# Altium PCB 06002479宁波2号线二期车载PIS系统_功率放大器功放板2  BHC-A-2030-04_PCB V1.0.PcbDoc (part 1 of 2)
Units mil, origin at the board's own origin, x right, y up, seen from the top; angles counter-clockwise.
Board outline 6377.95 x 3937.01 mil, 2 copper layers (Top Layer, Bottom Layer); 141 components, 101 nets, 406 pads, 71 vias.
Unrouted connection lines stored in the file: 3.
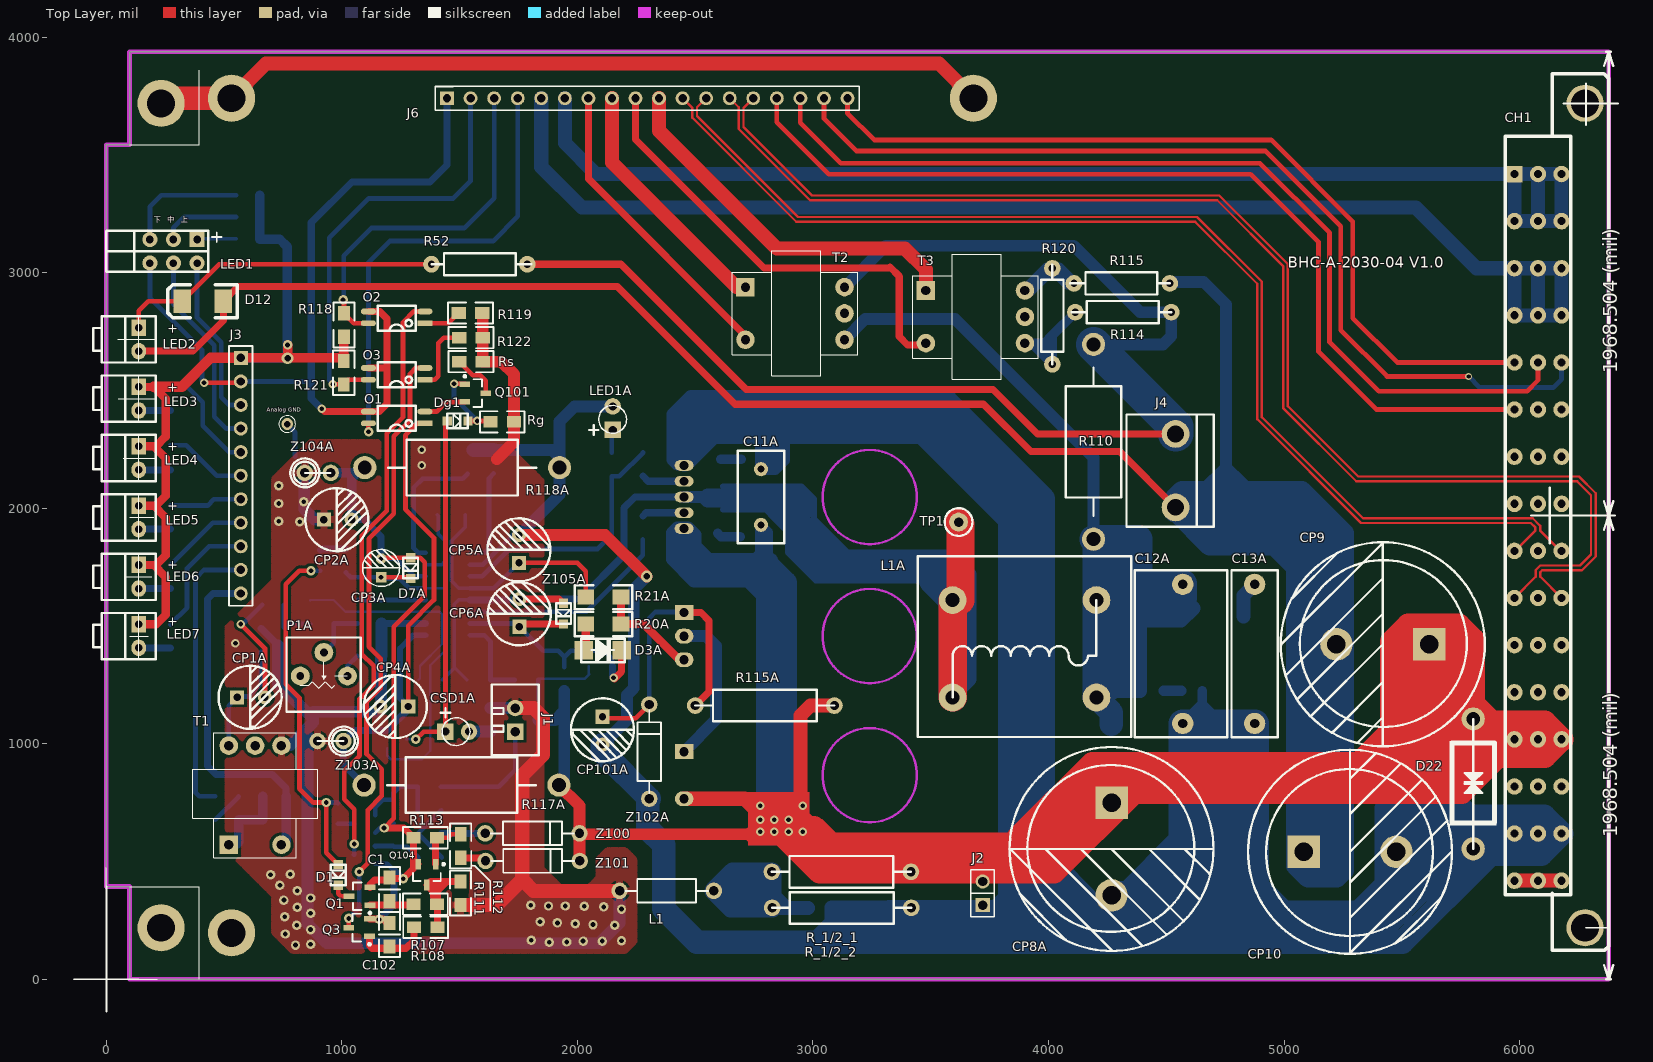
[diagram p0: Top Layer view]
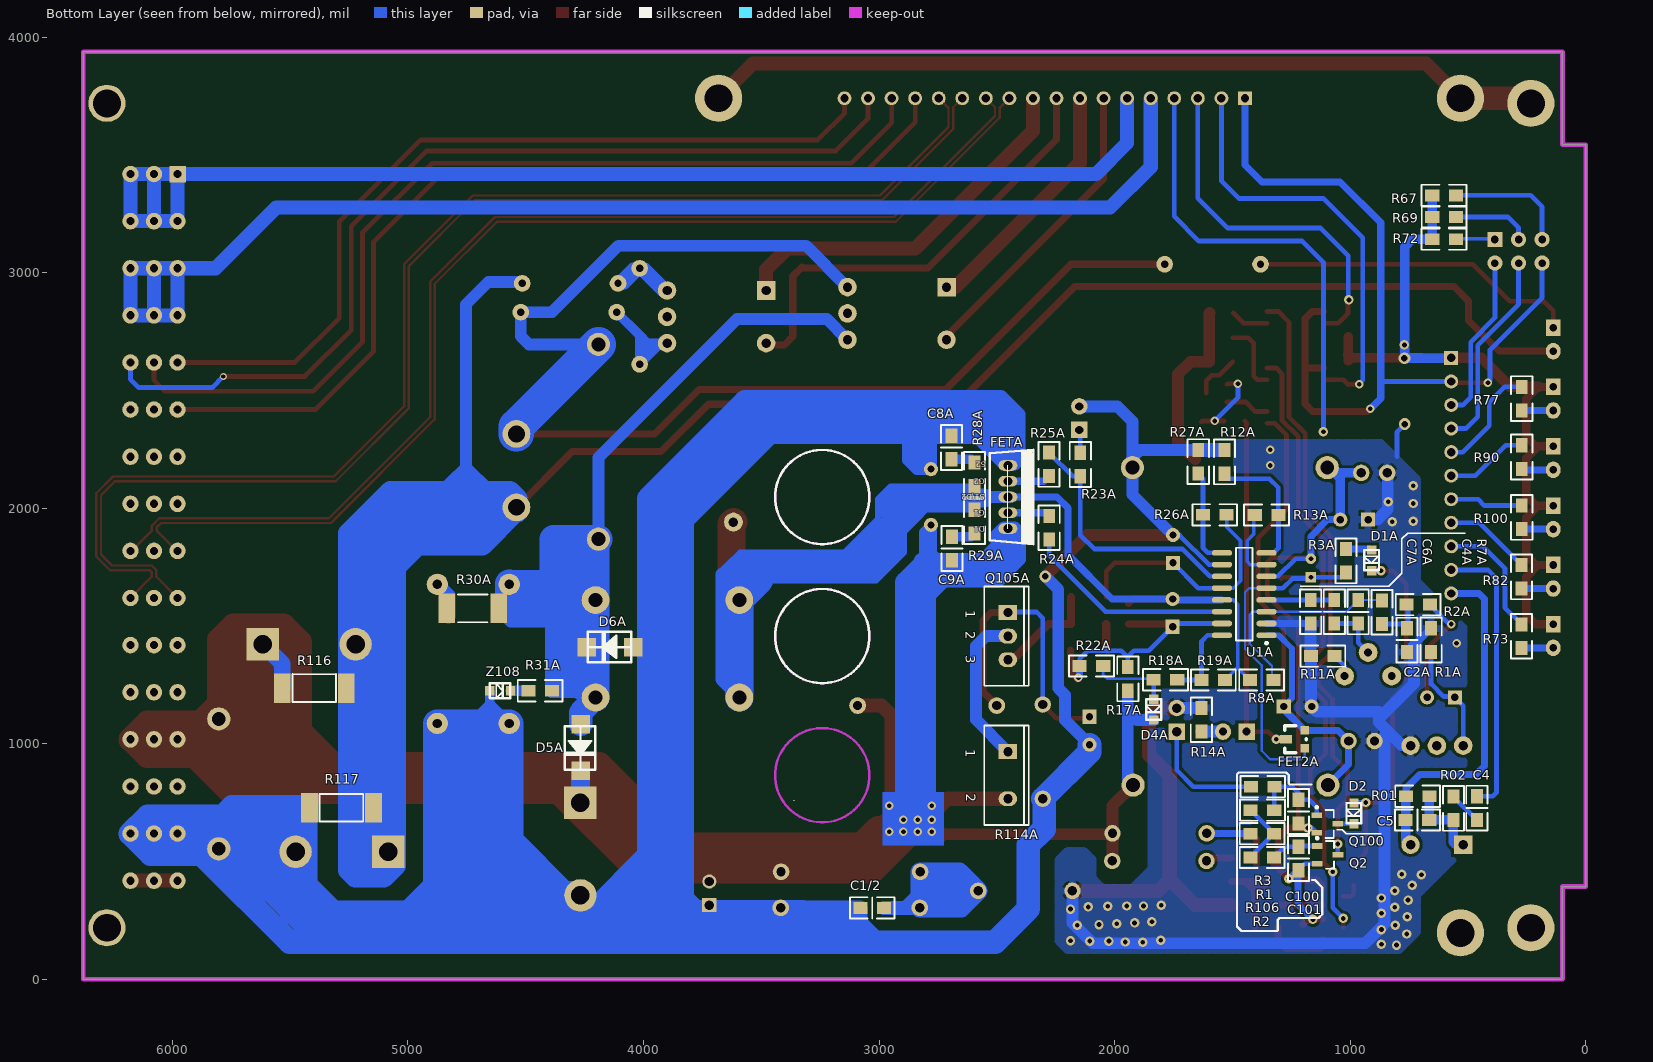
[diagram p1: Bottom Layer view, seen from below]

## Layer stack, top to bottom
Top Layer: signal copper 1.4
Dielectric: dielectric 12.6, FR-4, Dk 4.8
Bottom Layer: signal copper 1.4

## Board outline
0,393.7 0,3543.31 98.43,3543.31 98.43,3937.01 98.42,3937.01 6377.95,3937.01 6377.95,0 98.43,0 98.43,393.7

## Design rules (kind name [scope] priority, off if disabled: settings)
Clearance Clearance_1 [InPolygon] p1: gap=12
Clearance [All] p2: gap=10
ComponentClearance [All] p1: gap=0 collisioncheckmode=3 verticalgap=0 showdistances=FALSE
Height [All] p1: minheight=0 maxheight=1220.47 prefheight=500
HoleSize [All] p1: absolutevalues=TRUE maxlimit=500 minlimit=1 maxpercent=80.000 minpercent=20.000
MinimumSolderMaskSliver [All] p1: minsoldermaskwidth=0
PlaneConnect [All] p1: planeconnectstyle=Relief reliefexpansion=20 reliefentries=4 reliefconductorwidth=40 reliefairgap=20
PolygonConnect PolygonConnect_1 [Isvia] p1: connectstyle=Direct reliefconductorwidth=10 reliefentries=4 polygonreliefangle="90 Angle" airgapwidth=10
PolygonConnect [All] p2: connectstyle=Relief reliefconductorwidth=30 reliefentries=4 polygonreliefangle="90 Angle" airgapwidth=10
RoutingVias [All] p1: holewidth=28 width=50 viastyle="Through Hole" minholewidth=15 minwidth=30 maxholewidth=28 maxwidth=50
SilkToSilkClearance [All] p1: silktosilkclearance=0
SilkToSolderMaskClearance [IsPad] p1: minsilkscreentomaskgap=0 clearancetoexposedcopper=TRUE
SolderMaskExpansion [All] p1: expansion=4
Width [All] p1: maxlimit=200 minlimit=8 preferedwidth=10 minimp=50.000000 maximp=50.000000 favimp=50.000000
21 further rules are at their usual default settings.

## Components (designator, comment, footprint, x,y, rotation, side; value= is the part's Value field where it differs from the comment)
C1 "" c0805 1202,381 r270 top
C1/2 "Cap" C0805 3028.43,303.01 r180 bottom
C2A "" c0805 758.43,1440.26 r90 bottom
C4 "Cap" c0805 461.85,726.27 r270 bottom
C4A "" c0805 965.71,1559.47 r270 bottom
C5 "Cap" c0805 713.85,676.27 r180 bottom
C6A "" c0805 1067.09,1560.46 r90 bottom
C7A "" c0805 1167.48,1560.46 r90 bottom
C8A "" c0805 2692.31,2257.13 r270 bottom
C9A "" c0805 2690.31,1828.13 r270 bottom
C11A "" MKP-0.1-160V 2779.53,2047.24 r270 top
C12A "" MKP-7.5-10-15-400V 4570,1086 r90 top
C13A "" MKP-15-100V 4875,1086 r90 top
C100 "" c0805 1218.85,712.27 r90 bottom
C101 "" c0805 1219,513 r90 bottom
C102 "" c0805 1202,189 r270 top
CH1 "OPIN-48" OPIN-48F 6377.95,1968.5 r0 top locked
CP1A "" RB1/2 555.12,1196.85 r0 top
CP2A "" RB1/2 923.43,1951.26 r0 top
CP3A "" E10 1166.43,1746.26 r90 top
CP4A "" RB1/2 1281.65,1157.9 r180 top
CP5A "" RB1/2 1751.97,1767.72 r90 top
CP6A "" RB1/2 1753.43,1496.26 r90 top
CP8A "" CD-22*30 4267.43,553.01 r270 top
CP9 "" CD-22*30 5419,1422 r180 top
CP10 "" CD-22*30 5280,541 r0 top
CP101A "" RB1/2 2106.3,1114.17 r270 top
CSD1A "RED" LED-3 1489.85,1051.27 r0 top
D1 "" SOD-323 984.85,486.27 r270 top
D1A "" SOD-323 908.62,1822.27 r270 bottom
D2 "" SOD-323 983.85,748.27 r270 bottom
D3A "DIODE" MURA120T3G#1 2027.56,1397.64 r0 top
D4A "DIODE" SOD-323 1833.82,1188.41 r270 bottom
D5A "DIODE" MURA120T3G#2 4267,1082 r270 bottom
D6A "DIODE" MURA120T3G#2 4044,1409 r0 bottom
D7A "DIODE" SOD-323 1291.85,1789.27 r270 top
D12 "DIODE" 7227AK 409.45,2877.95 r180 top
D22 "D_TVS" TVS-CA 5803,1105 r270 top
Dg1 "" SOD-323 1447.64,2370.08 r0 top
FET2A "BS250F" STO23 1195.85,977.27 r90 bottom
FETA "IRFI4020" MOS_diy 2452.76,2047.24 r270 bottom locked
J1 "Jump" CH2.54-2 1735.85,1051.27 r90 top
J2 "CON2" SIP2.54-2 3720.47,314.96 r90 top
J3 "CON11" SIP2.54-11 570.87,2637.8 r90 top
J4 "CON2" CH3.96-3P+ 4539.37,2314.96 r270 top
J6 "CON18" SIP2.54-18 1446.46,3740.16 r0 top locked
L1 "磁珠" L-AXIAL0.4 2178.85,375.27 r0 top
L1A "Inductor Iron" 7G23A 3593,1196 r90 top
LED1 "LED" LED-3-3-L 118.11,3090.55 r0 top
LED1A "Blue" LED-3 2149.61,2381.89 r90 top
LED2 "RED" LED-3-L 137.8,2716.54 r90 top
LED3 "" LED-3-L 137.8,2464.57 r90 top
LED4 "" LED-3-L 137.8,2212.6 r90 top
LED5 "" LED-3-L 137.8,1960.63 r90 top
LED6 "" LED-3-L 137.8,1708.66 r90 top
LED7 "" LED-3-L 137.8,1456.69 r90 top
O1 "TLP281" SOP4 1352.43,2360.01 r180 top
O2 "TLP281" SOP4 1352.43,2785.01 r180 top
O3 "TLP281" SOP4 1352.43,2545.01 r180 top
P1A "Pot" 3362/3323 822.39,1246.8 r0 top
Q1 "MMBT5551" SOT-23B_N 1074.85,352.27 r180 top
Q2 "MMBT5551" SOT-23B_N 1095.85,528.27 r180 bottom
Q3 "MMBT5551" SOT-23B_N 1072.85,219.27 r180 top
Q100 "MMBT5551" SOT-23B_N 1096.85,659.27 r180 bottom
Q101 "MMBT5401" SOT-23B_N 1566.54,2488.37 r0 top
Q104 "MMBT5551" SOT-23B_N 1360.85,444.27 r270 top
Q105A "TIP31F" TO-220-AB-W 2452.76,1456.69 r270 bottom locked
R1 "" M0805 1371.85,717.27 r0 bottom
R01 "" M0805 713.85,777.27 r180 bottom
R1A "" M0805 655.85,1440.27 r270 bottom
R2 "" M0805 1373.85,517.27 r180 bottom
R02 "" M0805 561.85,725.27 r90 bottom
R2A "" M0805 711,1590 r0 bottom
R3 "" M0805 1370.85,817.27 r0 bottom
R3A "" M0805 1017.87,1776.01 r90 bottom
R7A "" M0805 865.32,1557.51 r90 bottom
R8A "" M0805 1375.16,1270.1 r0 bottom
R11A "" M0805 1115.32,1371.48 r0 bottom
R12A "" M0805 1532.97,2196.58 r270 bottom
R13A "" M0805 1354.49,1970.89 r0 bottom
R14A "" M0805 1631.85,1101.27 r90 bottom
R17A "" M0805 1943.43,1275.26 r270 bottom
R18A "" M0805 1783.62,1271.09 r0 bottom
R19A "" M0805 1580.87,1271.09 r180 bottom
R20A "" M1206 2110.24,1507.87 r0 top
R21A "" M1206 2110.24,1622.05 r0 top
R22A "" M0805 2098.43,1330.26 r180 bottom
R23A "" M0805 2145.67,2185.04 r90 bottom
R24A "res" M0805 2278.11,1916.21 r90 bottom
R25A "" M0805 2278.11,2186.21 r270 bottom
R26A "Res3" M0805 1574.96,1971.88 r180 bottom
R27A "" M0805 1644.19,2197.57 r270 bottom
R28A "" M0805 2594.65,2143.4 r270 bottom
R29A "" M0805 2594.65,1943.4 r270 bottom
R30A "" M2512R 4724.41,1574.8 r180 bottom
R31A "" M0805 4439,1225 r180 bottom
R52 "" R-1/4W 1380.4,3035.43 r0 top
R67 "" M0805 600.86,3327.36 r0 bottom
R69 "" M0805 600.8,3235.87 r0 bottom
R72 "" M0805 600.86,3141.36 r0 bottom
R73 "11k" M0805 271.65,1456.69 r270 bottom
R77 "11k" M0805 271.65,2464.57 r90 bottom
R82 "11k" M0805 271.65,1708.66 r270 bottom
R90 "11k" M0805 271.65,2216.54 r90 bottom
R100 "11k" M0805 271.65,1960.63 r90 bottom
R106 "" M0805 1373.85,618.27 r180 bottom
R107 "" M0805 1354.85,318.27 r180 top
R108 "" M0805 1355.85,220.27 r180 top
R110 "" R-2W 4191,2695 r270 top
R111 "" M0805 1502.85,365.27 r90 top
R112 "" M0805 1503.85,565.27 r90 top
R113 "" M0805 1354.85,600.27 r180 top
R114 "" R-1/4W 4521,2832 r180 top
R114A "" TO-220-AB 2452.76,866.14 r270 bottom locked
R115 "" R-1/4W 4515,2954 r180 top
R115A "" R-1W 2500.45,1162 r0 top
R116 "" 1T-2512 5397,1236 r0 bottom
R117 "" 1T-2512 5282,728 r180 bottom
R117A "" R-2W 1094.43,824.26 r0 top
R118 "" M0805 1008.43,2777.01 r90 top
R118A "" R-2W 1924,2172 r180 top
R119 "" M0805 1546.43,2828.43 r180 top
R120 "" R-1/4W 4016.43,2611.01 r90 top
R121 "" M0805 1008.43,2575.01 r270 top
R122 "" M0805 1548.43,2723.43 r180 top
R_1/2_1 "" R-1W 2825.43,456.01 r0 top
R_1/2_2 "" R-1W 3417.43,303.01 r180 top
Rg "Res3" M0805 1681.1,2366.14 r180 top
Rs "Res3" M0805 1548.43,2621.43 r180 top
T1 "EE13" EE13-C 519.85,571.27 r90 top
T2 "EE13" EE13-c 2713.39,2938.58 r0 top
T3 "EE13" EE13-C 3479.43,2924.01 r0 top
TP1 "TP" TP 3618.11,1940.94 r90 top
U1A "" SOIC16_N 1449.33,1635.26 r0 bottom locked
Z100 "75V 1N4761" AXIAL0.4AK 1608.85,619.27 r0 top
Z101 "36V 1N4753" AXIAL0.4AK 1609.85,502.27 r0 top
Z102A "12V" AXIAL0.4AK 2304.85,766.27 r90 top
Z103A "5.6V" AXIAL0.4AK-V 896.43,1011.26 r0 top
Z104A "5.6V" AXIAL0.4AK-V 952.76,2149.61 r180 top
Z105A "12V" SOD-323 1940.94,1595.67 r270 top
Z108 "12V" SOD-323 4652,1225 r180 bottom

## Footprints (in the part's own frame and the unit in brackets; to place one, negate y for a bottom-side part, rotate by r counter-clockwise, add the part's x,y. Pads: shape width x height; smd on the part's side, far side on the other; paste and mask are expansions set on the pad)
1T-2512 [mm] "Chip Resistor; Body 6.4 x 3.2 mm (LxW typ)"
  rect 1.8x3.2 smd: 1(-3.45,0) 2(3.45,0)
  silkscreen extent -2.35,-1.5 2.35,1.5, body extent -3.66,-1.5 3.66,1.5, height 1
7G23A [mm] "数字功放电感 22uH/15uH/10uH"
  round 3 hole 1.5: 1(0,0) 1(10.5,0) 2(0,-15.5) 2(10.5,-15.5)
  silkscreen extent -4.25,-19.25 15.25,3.75, body extent -4.25,-19.25 15.25,3.75, height 23
3362/3323 [mil]
  round 80 hole 33: 1(1.23,40.6) 2(101.23,140.6) 3(201.23,40.6)
  silkscreen extent -57,-111 257,204, body extent -57,-111 257,204, height 203
7227AK [mil]
  rect 75x100 smd: A(-87.25,-0.5) K(87.75,-0.5)
  silkscreen extent -147,-71 148,69, body extent -73,-28 65,31, height 57
AXIAL0.4AK [mil] "直插稳压管"
  round 70 hole 40: 1(0,0) 2(400,0)
  silkscreen extent 25,-50 375,50, body extent 92,-34 308,31, height 111
AXIAL0.4AK-V [mil]
  round 70 hole 40: 1(0,0) 2(110.24,0)
  silkscreen extent 0,-61 172,61, body extent -27,-31 114,33, height 217
c0805 [mil]
  rect 60x50 smd: 1(-50.36,-0.05) 2(49.64,-0.05)
  silkscreen extent -95,-45 95,45, body extent -39,-25 39,25, height 31
C0805 [mil]
  rect 60x50 smd: 1(-50.36,-0.05) 2(49.64,-0.05)
  silkscreen extent -95,-45 95,45, body extent -39,-25 39,25, height 31
CD-22*30 [mm] "160V 470uF 3000h"
  rect 3.5x3.5 hole 2: 1(-5,0)
  round 3.5 hole 2: 2(5,0)
  silkscreen extent -11,-11.02 11,11, body extent -11.01,-11.02 11.01,11.01, height 30.1
CH2.54-2 [mil]
  rect 70x70 hole 40: 1(0,0)
  round 70 hole 40: 2(100,0)
  silkscreen extent -100,-100 200,100, body extent -100,-100 200,100, height 276
CH3.96-3P+ [mm]
  round 3 hole 1.8: 1(0,0) 2(7.92,0)
  silkscreen extent -2.1,-5.3 10.02,4.1, body extent -2.1,-5.3 10.02,4.1, height 14.6
E10 [mil]
  rect 45x45 hole 20: 1(-39.37,0)
  round 45 hole 20: 2(39.37,0)
  silkscreen extent -79,-79 79,79, body extent -102,-99 96,100, height 446
EE13-C [mm]
  rect 2x2 hole 1.016: 1(0,0)
  round 2 hole 1.016: 2(0,-5.68) 3(10.68,0) 4(10.68,-2.84) 5(10.68,-5.68)
  silkscreen extent -1.41,-9.59 12.09,3.91, body extent -1.41,-9.59 12.09,3.91, height 9.35
EE13-c [mm]
  rect 2x2 hole 1.016: 1(0,0)
  round 2 hole 1.016: 2(0,-5.68) 3(10.68,0) 4(10.68,-2.84) 5(10.68,-5.68)
  silkscreen extent -1.41,-9.59 12.09,3.91, body extent -1.41,-9.59 12.09,3.91, height 9.35
L-AXIAL0.4 [mil] "磁珠"
  round 70 hole 40: 1(0,0) 2(400,0)
  silkscreen extent 25,-50 375,50, body extent 82,-79 318,78, height 157
LED-3 [mil]
  rect 70x70 hole 35: 1(-50,0)
  round 70 hole 35: 2(50,0)
  silkscreen extent -70,-59 54,100, body extent -66,-70 64,59, height 217
LED-3-3-L [mil]
  rect 65x65 hole 32: 1(266.89,50)
  round 65 hole 32: 2(266.89,-50) 3(166.89,50) 4(166.89,-50) 5(66.89,50) 6(66.89,-50)
  silkscreen extent -118,-87 371,87
LED-3-L [mil] "带座"
  rect 70x62 hole 32: 1(50,0)
  oval 70x62 hole 32: 2(-50,0)
  silkscreen extent -98,-73 98,193, body extent -103,-78 103,193, height 276
M0805 [mil]
  rect 60x50 smd: 1(-49.68,-0.37) 2(50.32,-0.37)
  silkscreen extent -95,-45 95,45, body extent -39,-25 39,25, height 31
M1206 [mm]
  rect 1.8x1.6 smd: 1(-1.9,0) 2(1.9,0)
  silkscreen extent -3.1,-1.3 3.1,1.3
M2512R [mm]
  rect 1.8x3.2 smd: 1(-2.8,0) 2(2.8,0)
  silkscreen extent -1.6,-1.5 1.6,1.5, body extent -2.79,-1.5 2.79,1.5, height 1.5
MKP-0.1-160V [mil] "100nF 160V"
  round 60 hole 30: 1(-118.11,0) 2(118.11,0)
  silkscreen extent -197,-98 197,98, body extent -195,-94 195,98, height 394
MKP-7.5-10-15-400V [mm] "MKP-B32652"
  round 2.3 hole 1: 1(0,0) 2(15,0)
  silkscreen extent -1.5,-4.8 16.5,5.2, body extent -1.37,-4.67 16.38,5.08, height 17
MKP-15-100V [mm] "MKP-B32652"
  round 2.3 hole 1: 1(0,0) 2(15,0)
  silkscreen extent -1.5,-2.5 16.5,2.5, body extent -1.5,-2.5 16.5,2.5, height 10
MOS_diy [mil]
  oval 45x80 hole 37.4: 1(-133.86,0) 2(-66.93,0) 3(0,0) 4(66.93,0) 5(133.86,0)
  Keep-Out Layer circle w10: c0,-788.19 r200
  silkscreen extent -200,-988 200,109, body extent -199,-929 199,8, height 156
MURA120T3G#1 [mm]
  rect 2x2 smd: 1(0,0) 2(4.064,0)
  silkscreen extent -0.3,-1.31 4.4,1.2
MURA120T3G#2 [mm]
  rect 2x2 smd: 1(0,0) 2(5,0)
  silkscreen extent 0.2,-1.7 4.9,1.6, body extent -0.04,-1.28 5.16,1.32, height 2.4
OPIN-48F [mil]
  round 157.48 hole 118.11: 0(-100,-1750) 8(-100,1750)
  round 70 hole 35: B2(-300,1450) B4(-300,1250) B6(-300,1050) B8(-300,850) B10(-300,650) B12(-300,450) B14(-300,250) B16(-300,50) B18(-300,-150) B20(-300,-350) B22(-300,-550) B24(-300,-750) B26(-300,-950) B28(-300,-1150) B30(-300,-1350) B32(-300,-1550) D4(-400,1250) D6(-400,1050) D8(-400,850) D10(-400,650) D12(-400,450) D14(-400,250) D16(-400,50) D18(-400,-150) D20(-400,-350) D22(-400,-550) D24(-400,-750) D26(-400,-950) D28(-400,-1150) D30(-400,-1350) D32(-400,-1550) Z2(-200,1450) Z4(-200,1250) Z6(-200,1050) Z8(-200,850) Z10(-200,650) Z12(-200,450) Z14(-200,250) Z16(-200,50) Z18(-200,-150) Z20(-200,-350) Z22(-200,-550) Z24(-200,-750) Z26(-200,-950) Z28(-200,-1150) Z30(-200,-1350) Z32(-200,-1550)
  rect 70x70 hole 35: D2(-400,1450)
  silkscreen extent -440,-1844 26,1876, body extent -444,-1851 442,1850, height 470
R-1/4W [mm]
  round 1.8 hole 0.8: 1(0,0) 2(10.338,0)
  silkscreen extent 0,-1.2 10.76,1.2, body extent -0.23,-1.33 10.53,1.19, height 2
R-1W [mm] "1W电阻"
  round 1.8 hole 1: 1(0,0) 2(15,0)
  silkscreen extent 0,-1.7 15,1.7, body extent 0.79,-1.46 14.25,1.4, height 0.5
R-2W [mm] "2W电阻"
  round 2.5 hole 1.5: 1(0,0) 2(21,0)
  silkscreen extent 2.5,-3 18.5,3, body extent -0.6,-3.3 21.6,3.3, height 8.3
RB1/2 [mil]
  rect 60x60 hole 31.5: 1(0,0)
  round 60 hole 31.5: 2(118.11,0)
  silkscreen extent -79,-134 189,134
SIP2.54-2 [mil]
  rect 60x60 hole 40: 1(0,0)
  round 60 hole 40: 2(100,0)
  silkscreen extent -50,-50 150,50, body extent -53,-53 153,53, height 945
SIP2.54-11 [mm]
  rect 1.5x1.5 hole 0.9: 1(0,0)
  round 1.5 hole 0.9: 2(-2.54,0) 3(-5.08,0) 4(-7.62,0) 5(-10.16,0) 6(-12.7,0) 7(-15.24,0) 8(-17.78,0) 9(-20.32,0) 10(-22.86,0) 11(-25.4,0)
  silkscreen extent -26.72,-1.27 1.27,1.27, body extent -26.72,-1.27 1.27,1.27, height 24
SIP2.54-18 [mm]
  rect 1.5x1.5 hole 0.9: 1(0,0)
  round 1.5 hole 0.9: 2(2.54,0) 3(5.08,0) 4(7.62,0) 5(10.16,0) 6(12.7,0) 7(15.24,0) 8(17.78,0) 9(20.32,0) 10(22.86,0) 11(25.4,0) 12(27.94,0) 13(30.48,0) 14(33.02,0) 15(35.56,0) 16(38.1,0) 17(40.64,0) 18(43.18,0)
  silkscreen extent -1.27,-1.3 44.45,1.3, body extent -1.27,-1.3 44.5,1.3, height 24
SOD-323 [mm]
  rect 1x1 smd: 1(0,0) 2(2.23,0)
  silkscreen extent 0,-0.84 2.2,0.8, body extent -0.13,-0.93 2.33,0.93, height 1.1
SOIC16_N [mm] "SOIC, 16-Leads, Body 9.9x3.9mm, Pitch 1.27mm, IPC Medium Density"
  oval 2.2x0.6 smd: 1(-2.4,4.445) 2(-2.4,3.175) 3(-2.4,1.905) 4(-2.4,0.635) 5(-2.4,-0.635) 6(-2.4,-1.905) 7(-2.4,-3.175) 8(-2.4,-4.445) 9(2.4,-4.445) 10(2.4,-3.175) 11(2.4,-1.905) 12(2.4,-0.635) 13(2.4,0.635) 14(2.4,1.905) 15(2.4,3.175) 16(2.4,4.445)
  silkscreen extent -2.52,-5 0.9,5.42, body extent -2,-5 2,5, height 1.91
SOP4 [mil] "TLP281"
  rect 64x24 smd: 1(0,0)
  oval 64x24 smd: 2(0,-50) 3(240,-50) 4(240,0)
  silkscreen extent 39,-75 201,31, body extent 34,-80 206,36, height 59
SOT-23B_N [mm]
  rect 1.15x0.6 smd: 1(-1.125,0.95) 2(-1.125,-0.95) 3(1.125,0)
  silkscreen extent -1.25,-1.5 0.7,1.92, body extent -1.35,-1.46 1.12,1.46, height 1
STO23 [mil] "P-MOS--BS250F"
  rect 36x50 smd: 1(41.94,76.06)
  rect 36x36 smd: 2(3.94,-3.94) 3(78.94,-3.94)
  silkscreen extent -16,-9 99,81
TO-220-AB [mm]
  rect 1.6x2 hole 1: 1(-2.54,0)
  oval 1.6x2 hole 1: 2(2.54,0)
  Keep-Out Layer circle w0.254: c0,-20.02 r5.08
  silkscreen extent -5.35,-2.55 5.35,2.25, body extent -4.92,-2.11 4.98,2.39, height 18.8
TO-220-AB-W [mm] "TO, Thru-Hole, Vertical, Heatsink Mounted; 3 In-Line Leads; Pitch 2.54 mm"
  rect 1.6x2 hole 1: 1(-2.54,0)
  oval 1.6x2 hole 1: 2(0,0) 3(2.54,0)
  Keep-Out Layer circle w0.254: c0,-20.02 r5.08
  silkscreen extent -5.35,-25.1 5.35,2.25, body extent -4.95,-23.52 4.95,0.28, height 4
TP [mil] "test point"
  round 80 hole 40: 1(0,0)
  silkscreen extent -59,-59 59,59
TVS-CA [mm] "1.5k150CA"
  round 2.5 hole 1.5: 1(0,0) 2(14,0)
  silkscreen extent 0,-2.5 14,2.5

## Part data
C1 C2A C4A C6A C7A C8A C9A C11A C12A C13A C100 C101 C102: library part Cap, "Capacitor"
C1/2 C4 C5: "Capacitor"
CP1A CP2A CP3A CP4A CP5A CP6A CP8A CP9 CP10 CP101A: library part "Cap Pol1", "Polarized Capacitor (Radial)"
CSD1A LED2: library part LED2, "Typical RED, GREEN, YELLOW, AMBER GaAs LED"
D1 D1A D2 Dg1: library part D
D3A D4A D5A D6A D7A D12: "Default Diode"
FET2A: library part MOSFET-P, "P-Channel MOSFET"
FETA: library part IRF4019H-117P
J2 J4 J6: "Connector"
L1: library part Res2, "inductor"
L1A: "Magnetic-Core Inductor"
LED1: library part 3-LED
LED1A: library part LED1, "Typical RED GaAs LED"
LED3 LED4 LED5 LED6 LED7: library part LED
O1 O2 O3: library part Optoisolator1, "4-Pin Phototransistor Optocoupler"
P1A: library part RPot, "Potentiometer"
Q1 Q2 Q3 Q100 Q104: library part NPN, "NPN Bipolar Transistor"
Q101: library part PNP, "PNP Bipolar Transistor"
Q105A: library part QNPN, "NPN Bipolar Transistor"
R1 R01 R1A R2 R02 R2A R3 R3A R7A R8A R11A R12A R13A R14A R17A R18A R19A R20A R21A R22A R23A R24A R25A R27A R28A R29A R30A R31A R52 R73 R77 R82 R90 R100 R106 R107 R108 R110 R111 R112 R113 R114 R114A R115 R115A R116 R117 R117A R118 R118A R119 R120 R121 R122 R_1/2_1 R_1/2_2: library part Res3, "Resistor"
R26A Rg Rs: "Resistor"
R67 R69 R72: library part RES1
U1A: library part IRS2092(S)
Z100 Z101: library part ZENER
Z102A Z103A Z104A Z105A Z108: library part "D Zener", "Zener Diode"

## Free pads (board coordinates)
  round 200 hole 118.11: 7(232.28,218.51) 8(232.28,3718.51) 8(531.5,196.85) 8(531.5,3740.16) 8(3681.1,3740.16)

## Via types
v1: diameter 40, hole 20, Top Layer to Bottom Layer, 48 vias
v2: diameter 36, hole 20, Top Layer to Bottom Layer, 19 vias
v3: diameter 50, hole 28, Top Layer to Bottom Layer, 3 vias
v4: diameter 30, hole 18, Top Layer to Bottom Layer, 1 vias

## Nets (pads, with @x,y where several pads share a name; then routed paths per layer and width w, separated by ;. In a path a pad name is that pad's centre, name@x,y a point inside that pad or via, vN(x,y) a via of type N, cw(c..) or ccw(c..) an arc to the next point about the centre after c; other vN are vias at no path point)
+0DB_CPU: J3.6 R90.2 | length 353
  Bottom Layer w20: R90.2@271.28,2266.86 339.44,2266.86 468.5,2137.8 J3.6@570.87,2137.8
+3DB_CPU: J3.5 R77.2 | length 472
  Bottom Layer w20: R77.2@271.28,2514.89 343.38,2514.89 409.45,2448.82 409.45,2350.39 522.05,2237.8 J3.5@570.87,2237.8
+24VGND: CH1.B2 CH1.B4 CH1.D2 CH1.D4 CH1.Z2 CH1.Z4 J6.6 | length 5276.4
  Bottom Layer w60: J6.6@1946.46,3740.16 1946.46,3549.61 2077.56,3418.5 CH1.D2@5977.95,3418.5 ; CH1.D2@5977.95,3418.5 CH1.D4@5977.95,3218.5 CH1.B4@6077.95,3218.5 ; CH1.D2@5977.95,3418.5 CH1.B2@6077.95,3418.5 ; CH1.B4@6077.95,3218.5 CH1.Z4@6177.95,3218.5 CH1.Z2@6177.95,3418.5 CH1.B2@6077.95,3418.5 ; CH1.B4@6077.95,3218.5 CH1.B2@6077.95,3418.5
+VAA_A: CP4A.1 FET2A.3 O1.1 R117A.1 U1A.1 Z103A.2 | length 2309.2
  Top Layer w20: CP4A.1@1281.65,1157.9 1281.65,1501.07 1390.85,1610.27 1390.85,1874.15 1270,1995 1270,2310 1320.01,2360.01 O1.1@1352.43,2360.01
  Bottom Layer w25: CP4A.1@1281.65,1157.9 1246.43,1193.13 1246.43,1404.26 1302.43,1460.26 U1A.1@1354.84,1460.26
  Bottom Layer w30: R117A.1@1094.43,824.26 1006.66,912.03 Z103A.2@1006.66,1011.26 1051.6,1056.2 FET2A.3@1191.91,1056.2 1281.65,1145.94 CP4A.1@1281.65,1157.9
-3DB_CPU: J3.7 R100.2 | length 310.7
  Bottom Layer w20: R100.2@271.28,2010.95 429.85,2010.95 456.69,2037.8 J3.7@570.87,2037.8
-6DB_CPU: J3.8 R82.1 | length 373.2
  Bottom Layer w20: R82.1@272.02,1758.34 451.48,1937.8 J3.8@570.87,1937.8
-9DB_CPU: J3.9 R73.1 | length 534.1
  Bottom Layer w20: R73.1@272.02,1506.37 342.52,1576.87 342.52,1744.09 436.22,1837.8 J3.9@570.87,1837.8
-VSS_A: C1.1 C100.1 C101.1 C102.1 CP2A.2 CP3A.2 D7A.1 Q1.2 Q2.2 Q3.2 Q100.2 Q104.2 R113.2 R118A.2 U1A.6 Z104A.1 | length 3436.2
  Top Layer w20: CP3A.2@1166.43,1785.63 1170.06,1789.27 D7A.1@1291.85,1789.27 1332.85,1789.27 1351.85,1770.27 1351.85,1628.27 1219.85,1496.27 1219.85,682.85 ; v1(1179,642) 1219.85,682.85 ; 1219.85,694 1219.85,682.85
  Top Layer w30: Q3.2@1117.14,256.67 1176.76,256.67 1201.8,231.63 1200.21,231.63 1177.84,254 v1(1158,254) ; Q1.2@1119.14,389.67 1119.14,402.56 1138.21,421.63 C1.1@1201.8,421.63 ; v1(1179,642) 1263.16,642 R113.2@1304.53,600.64 1304.53,507.48 ; C1.1@1201.95,431.36 1206.31,427 v1(1261,427) 1304.53,470.53 1304.53,507.48 ; Q104.2@1323.45,488.56 1304.53,507.48
  Bottom Layer w20: Q2.2@1140.14,490.87 1192.84,490.87 C101.1@1220.8,462.91 ; Q100.2@1141.14,621.87 1164.54,645.27 1202.16,645.27 C100.1@1218.8,661.91 ; CP3A.2@1166.43,1785.63 1231.06,1785.63 1306.43,1710.26 U1A.6@1354.84,1710.26
  Bottom Layer w30: CP2A.2@1041.54,1951.26 1095.43,1951.26 1166.43,1880.26 CP3A.2@1166.43,1785.63 ; v1(1158,254) 1220.8,316.8 ; 1220.8,322 1220.8,316.8 ; v1(1261,427) 1256.71,427 1220.8,462.91 1220.8,316.8
  Bottom Layer w35: CP2A.2@1041.54,1951.26 CP2A.2@1041.54,1970.27
  Bottom Layer w40: Z104A.1@950.43,2147.28 Z104A.1@952.76,2149.61 R118A.2@1065,2149.61 ; CP2A.2@1041.54,1970.27 1041.54,2126.14 R118A.2@1065,2149.61 ; R118A.2@1065,2149.61 1074.83,2149.61 R118A.2@1097.23,2172 1087.39,2172 R118A.2@1065,2149.61
ADDR1: CH1.D10 J6.18 | length 3573.3
  Top Layer w20: J6.18@3146.46,3740.16 3146.46,3676.38 3259.84,3562.99 4944.88,3562.99 5291.34,3216.54 5291.34,2807.09 5479.92,2618.51 CH1.D10@5977.95,2618.51
ADDR2: CH1.B10 J6.16 | length 4075.1
  Top Layer w20: J6.16@2946.46,3740.16 2946.46,3636.22 3118.11,3464.57 4897.64,3464.57 5192.91,3169.29 5192.91,2704.72 5401.57,2496.06 6031.5,2496.06 6077.95,2542.52 CH1.B10@6077.95,2618.51
ADDR3: CH1.Z10 J6.17 | length 4034.3
  Top Layer w20: J6.17@3046.46,3740.16 3046.46,3654.33 3185.04,3515.75 4921.26,3515.75 5240.16,3196.85 5240.16,2755.91 5437.01,2559.06 v4(5783.46,2559.06)
  Bottom Layer w20: v4(5783.46,2559.06) 5830.71,2511.81 6141.73,2511.81 6177.95,2548.03 CH1.Z10@6177.95,2618.51
ADDR4: CH1.D12 J6.15 | length 4011
  Top Layer w20: J6.15@2846.46,3740.16 2846.46,3637.8 3066.93,3417.32 4858.27,3417.32 5145.67,3129.92 5145.67,2665.35 5392.52,2418.51 CH1.D12@5977.95,2418.51
AGND1: C5.1 J3.11 R01.1 T1.2 | length 1457.4
  Bottom Layer w30: 453.29,1638.06 453.03,1637.8 ; J3.11@570.87,1637.8 453.03,1637.8 ; R01.1@763.53,776.9 763.53,809.28 702.81,870 465.81,870 429.81,906 429.81,1614.58 453.03,1637.8
  Bottom Layer w40: R01.1@763.53,776.9 764.21,776.21 C5.1@764.21,676.22 T1.2@764.21,585.53
"ANALOG GND": C2A.1 C7A.1 CP2A.1 CP4A.2 J1.2 L1.1 R1A.1 R11A.2 R14A.2 R111.1 R119.1 R122.1 Rg.1 Rs.1 T1.5 U1A.2 Z103A.1 Z104A.2 | length 6796.9
  Top Layer w50: R119.1@1596.1,2828.8 1598.1,2826.8 R122.1@1598.1,2723.8 Rs.1@1598.1,2621.8 1677.41,2621.8 1730.78,2568.43 Rg.1@1730.78,2366.51 1730.78,2281.31 1657.48,2208.01
  Top Layer w60: R111.1@1503.22,315.59 1658.17,315.59 1765.85,423.27 ; J1.2@1735.85,1151.27 1813.85,1151.27 1853.85,1111.27 1853.85,953.27 1765.85,865.27 1765.85,423.27 ; L1.1@2178.85,375.27 1813.85,375.27 1765.85,423.27
  Bottom Layer w20: v3(768,2357) 768,2356 801.3,2322.7 801.3,2218.62 ; 828.85,1041.27 858.86,1011.26 Z103A.1@896.43,1011.26 850.79,1056.9 850.79,1063.21
  Bottom Layer w25: R11A.2@1165.64,1371.85 R11A.2@1167.6,1373.81
  Bottom Layer w30: R1A.1@656.22,1489.94 728.35,1417.82 ; C7A.1@1167.43,1510.1 1167.6,1510.26 U1A.2@1354.84,1510.26
  Bottom Layer w50: 728.35,1417.82 728.35,1255.91 878.85,1105.4 878.85,1091.27 850.79,1063.21 828.85,1041.27 ; T1.5@776.47,993.74 781.32,993.74 828.85,1041.27 ; 828.85,1037.27 828.85,1041.27 ; Z104A.2@842.52,2149.61 840.19,2147.28 840.19,1994.93 883.86,1951.26 CP2A.1@923.43,1951.26 ; 853.85,1011.27 853.85,235.27 935.85,153.27 2092.85,153.27 2178.85,239.27 L1.1@2178.85,375.27 ; 878.85,1135.27 1140.91,1135.27 CP4A.2@1163.54,1157.9 1165.64,1159.99 R11A.2@1165.64,1371.85 ; R11A.2@1167.6,1373.81 C7A.1@1167.6,1510.26 ; R14A.2@1631.48,1151.59 1735.53,1151.59 J1.2@1735.85,1151.27
  other v1: 803,145 867,148 1880,157 1955,158 2024,162 2105,162 2187,164 1804,165 760,192 867,211 809,229 2159,229 2066,232 1991,235 1915,239 1841.3,244 757,265 867,280 2187,298 811,306 2112,307 2029,310 1877,311 1948,311 1802,314 754,336 867,345 811.07,376.01 737,399 697.3,444 781,446 821,1942 732.28,1944.88 732.28,2019.68 838.58,2027.56 732.28,2094.49
  other v2: 548,1427 1338.58,2181.1 1338.58,2248.03
AUDIO_OUT: C4.1 J3.10 | length 1245.1
  Bottom Layer w20: 453.29,1738.06 414.87,1738.06 414.61,1737.8 ; C4.1@461.9,776.63 394.18,776.63 378.81,792 378.81,1702 414.61,1737.8 ; J3.10@570.87,1737.8 414.61,1737.8
CSD_A: CSD1A.1 Dg1.1 FET2A.1 | length 1502.7
  Top Layer w20: v1(1313.85,1018.27) 1346.85,1051.27 CSD1A.1@1439.85,1051.27 1439.85,1974.27 1439.85,2362.29 Dg1.1@1447.64,2370.08
  Bottom Layer w10: FET2A.1@1272.85,1018.27 v1(1313.85,1018.27)
DC110CVGND: C1/2.1 C8A.1 C11A.1 C12A.1 C13A.1 CH1.B30 CH1.D30 CH1.Z30 CP5A.2 CP8A.2 CP10.2 CP101A.2 D6A.1 D22.2 FETA.1 J2.1 LED1A.2 R12A.1 R27A.1 R117.1 R118A.1 R_1/2_2.1 U1A.10 Z102A.1 Z108.1 | length 41085.1
  Top Layer w50: CP5A.2@1751.97,1885.83 2118.17,1885.83 v3(2294,1710)
  Bottom Layer w20: U1A.10@1543.82,1760.26 1598.84,1760.26 1724.41,1885.83 CP5A.2@1751.97,1885.83
  Bottom Layer w40: C12A.1@4570,1086 4652,1168 ; Z108.1@4652,1225 4652,1169 ; 4653,1086 4652,1087 4652,1168 ; 4735,1086 4652,1169 ; 4652,1168 4652,1169
  Bottom Layer w50: R27A.1@1644.56,2247.24 1890.76,2247.24 R118A.1@1924,2214 ; CP5A.2@1751.97,1885.83 1924,2057.86 R118A.1@1924,2172 R118A.1@1924,2214 ; CP101A.2@2106.3,996.06 2211,1100.76 2211,1207 2239,1235 2239,1655 v3(2294,1710) ; LED1A.2@2149.61,2431.89 1987.89,2431.89 1924,2368 R118A.1@1924,2214 ; 2775.59,2322.83 2779.53,2318.9 C11A.1@2779.53,2165.35 2818.9,2165.35 ; 2826.77,2322.83 2818.9,2314.96 ; 2877.95,2322.83 2877.95,2204.72 2864.17,2190.94 ; 2818.9,2165.35 2818.9,2314.96 ; 2818.9,2165.35 2838.58,2165.35 2864.17,2190.94 ; 2818.9,2314.96 2864.17,2269.68 2864.17,2190.94
  Bottom Layer w60: R12A.1@1558.28,2247.24 R27A.1@1644.56,2247.24 ; 2452.76,2204.72 2437.03,2189 2426,2189 2409,2206 2409,2274 ; 2570.87,2322.83 2570.87,2369.87 2601,2400 ; 2576.85,157.27 2577.11,157.01 2590.85,143.27 ; 2708.43,143.01 3325.43,143.01 3339.43,157.01 3417.43,235.01 3977,235.01 4146.28,235.01 4193.28,282.01 4197.28,286.01 4206.35,295.08 CP8A.2@4267.43,356.16 ; 3014.43,179.01 3078.79,243.37 ; R_1/2_2.1@3407.43,304.01 3248.43,304.01 ; 3567,2451 3546,2472 2483,2472 2442.5,2431.5 ; 3805.12,2088.58 3917.5,1976.2 3946.43,1947.28 ; 3946.43,555.01 3946.43,1947.28 ; 5622.08,356.16 D22.2@5784.43,518.51 ; 5722.92,518.51 D22.2@5784.43,518.51 ; 5730,521.89 5740.43,521.89 ; D22.2@5832.75,518.51 D22.2@5784.43,518.51 ; 2409,2274 2409,2398 2442.5,2431.5 ; 2409,2274 2447.5,2312.5 ; 2442.5,2431.5 2447.5,2426.5 2447.5,2312.5 ; 2442.5,2431.5 2503.5,2431.5 ; 2447.5,2312.5 2485,2350 ; 2485,2350 2485,2413 2503.5,2431.5 ; 2485,2350 2535,2400 ; 2503.5,2431.5 2535,2400 ; 2535,2400 2601,2400 ; 2601,2400 3549,2400 3856,2093 3857.85,2093 3946.43,2004.43 3946.43,1947.28 ; 3078.79,243.37 C1/2.1@3078.79,302.96 C1/2.1@3079.83,304.01 ; 3078.79,243.37 3078.79,191.65 3091.43,179.01 3091.43,292.42 3153.43,230.42 3153.43,179.01 3248.43,274.01 3248.43,304.01 ; 3078.79,243.37 3079.83,244.42 C1/2.1@3079.83,304.01 ; C1/2.1@3079.83,304.01 3169.43,304.01 ; 3169.43,304.01 3248.43,304.01 ; 3169.43,304.01 3130.43,265.01 3130.43,256.01 3200.43,256.01 3248.43,304.01
  Bottom Layer w70: 5298.28,285.01 5417.83,404.56 ; 5486.43,282.01 5417.83,350.61 5417.83,404.56 ; 5493,365 5417.83,440.17 ; D22.2@5805.27,545.99 5805.27,551.55 5805.27,612 5805.27,618.51 5805.27,691.73 5749,748 5437.83,748 R117.1@5417.83,728 5417.83,440.17 ; 5417.83,404.56 5417.83,440.17
  Bottom Layer w100: CP101A.2@2106.3,996.06 2106.3,964.82 Z102A.1@2304.85,766.27 2299.21,760.63 2299.21,637.8 2366.14,570.87 2366.14,298.74 2507.61,157.27 ; 2452.76,2204.72 2570.87,2322.83 2775.59,2322.83 2826.77,2322.83 2877.95,2322.83 3464.57,2322.83 ; 2535,2400 2586,2451 3567,2451 3978,2040 3978,523.43 ; 2576.85,157.27 2507.61,157.27 ; 3091.43,179.01 3153.43,179.01 3216.43,179.01 3323.43,286.01 R_1/2_2.1@3407.43,286.01 ; 3805.12,2088.58 3551.18,2342.52 3484.25,2342.52 3464.57,2322.83 ; 3838.58,470.01 3838.58,344 ; 3868,1754 3917.5,1704.5 3917.5,1976.2 ; 3907,1643 3907,286.01 ; 3946.43,555.01 3978,523.43 ; 3977,235.01 3978,236.01 3978,286.01 ; 4002.78,378.51 4095.28,286.01 ; 4193.28,282.01 4540.01,282.01 4591,282.01 4726,282.01 5486.43,282.01 ; 4197.28,286.01 4095.28,286.01 ; 4206.35,295.08 3978,523.43 ; 4872.43,285.01 4983,285.01 5298.28,285.01 ; 5496,282.01 5486.43,282.01 ; 5603,495 5603,518 5601,520 ; D22.2@5803,553.82 5805.27,551.55 5825.32,531.5 6090.95,531.5 CH1.Z30@6177.95,618.51 ; 5805.27,612 5798.76,618.51 ; 2507.61,157.27 2507.87,157.01 2577.11,157.01 3339.43,157.01 ; 3339.43,157.01 5501.43,157.01 5862.92,518.51 5832.75,518.51 5805.27,545.99 5776.43,574.83 5776.43,572.01 5722.92,518.51 5486.43,282.01 ; 3339.43,157.01 3339.43,218.01 R_1/2_2.1@3407.43,286.01 ; R_1/2_2.1@3407.43,286.01 3780.59,286.01 ; 3464.57,2322.83 3834.43,1952.98 3834.43,339.84 ; 3780.59,286.01 3834.43,339.84 ; 3780.59,286.01 3834.43,286.01 ; 3834.43,286.01 3838.58,286.01 ; 3834.43,286.01 3834.43,339.84 ; 3834.43,339.84 3838.58,344 ; 3838.58,286.01 3907,286.01 ; 3838.58,286.01 3838.58,344 ; 3907,286.01 3978,286.01 ; 3978,286.01 4095.28,286.01 ; 3978,286.01 3978,523.43 ; 4095.28,286.01 4146.28,235.01 4170.28,211.01 5415.43,211.01 5486.43,282.01 ; 5517,604 5517,496 5547,466 5601,520 ; 5517,604 5517,611 ; 5517,604 5510,611 5517,611 ; 5517,604 5601,520 ; 5517,611 5517,629 5535,611 ; 5517,611 5535,611 ; 5535,611 5615,611 5617,609 ; 5535,611 5537,609 5617,609 ; 5601,520 5631,550 5631,595 5617,609 ; 5617,609 5725,609 5568.71,452.71 5568.71,366.29 5476.85,458.15 CP10.2@5476.85,541 5476.85,672.85 5495,691 5657.48,691 ; 5657.48,691 5660.25,691 ; 5657.48,691 5658.21,691.73 5805.27,691.73 6104.73,691.73 CH1.Z30@6177.95,618.51 ; 5660.25,691 5726.27,691 5798.76,618.51 ; 5660.25,691 5732.75,618.51 5798.76,618.51 ; 5798.76,618.51 5805.27,618.51 CH1.D30@5977.95,618.51 CH1.B30@6077.95,618.51 CH1.Z30@6177.95,618.51
  Bottom Layer w120: CP8A.2@4267.43,356.16 4339.47,356.16 ; 4540.01,282.01 4772,514 ; 4591,282.01 4702,393.01 4772,393.01 ; 4726,282.01 4772,328.01 4772,385.43 ; 4726,1002 4791,1002 ; 4872.43,285.01 4772,385.43 ; 4983,285.01 4875,393.01 ; 4339.47,356.16 4487.16,356.16 4666,535 4666,990 C12A.1@4570,1086 ; 4339.47,356.16 4570,586.68 C12A.1@4570,1086 ; C12A.1@4570,1086 4653,1086 4735,1086 C13A.1@4875,1086 ; 4772,385.43 4772,393.01 ; 4772,393.01 4875,393.01 ; 4772,393.01 4772,514 ; 4772,514 4772,983 4791,1002 ; 4791,1002 C13A.1@4875,1086 ; 4875,393.01 C13A.1@4875,1086